# Altium PCB PCB1.PcbDoc (part 1 of 2)
Units mil, origin at the board's own origin, x right, y up, seen from the top; angles counter-clockwise.
Board outline 6000 x 4000 mil, 2 copper layers (Top Layer, Bottom Layer); 224 components, 172 nets, 745 pads, 57 vias.
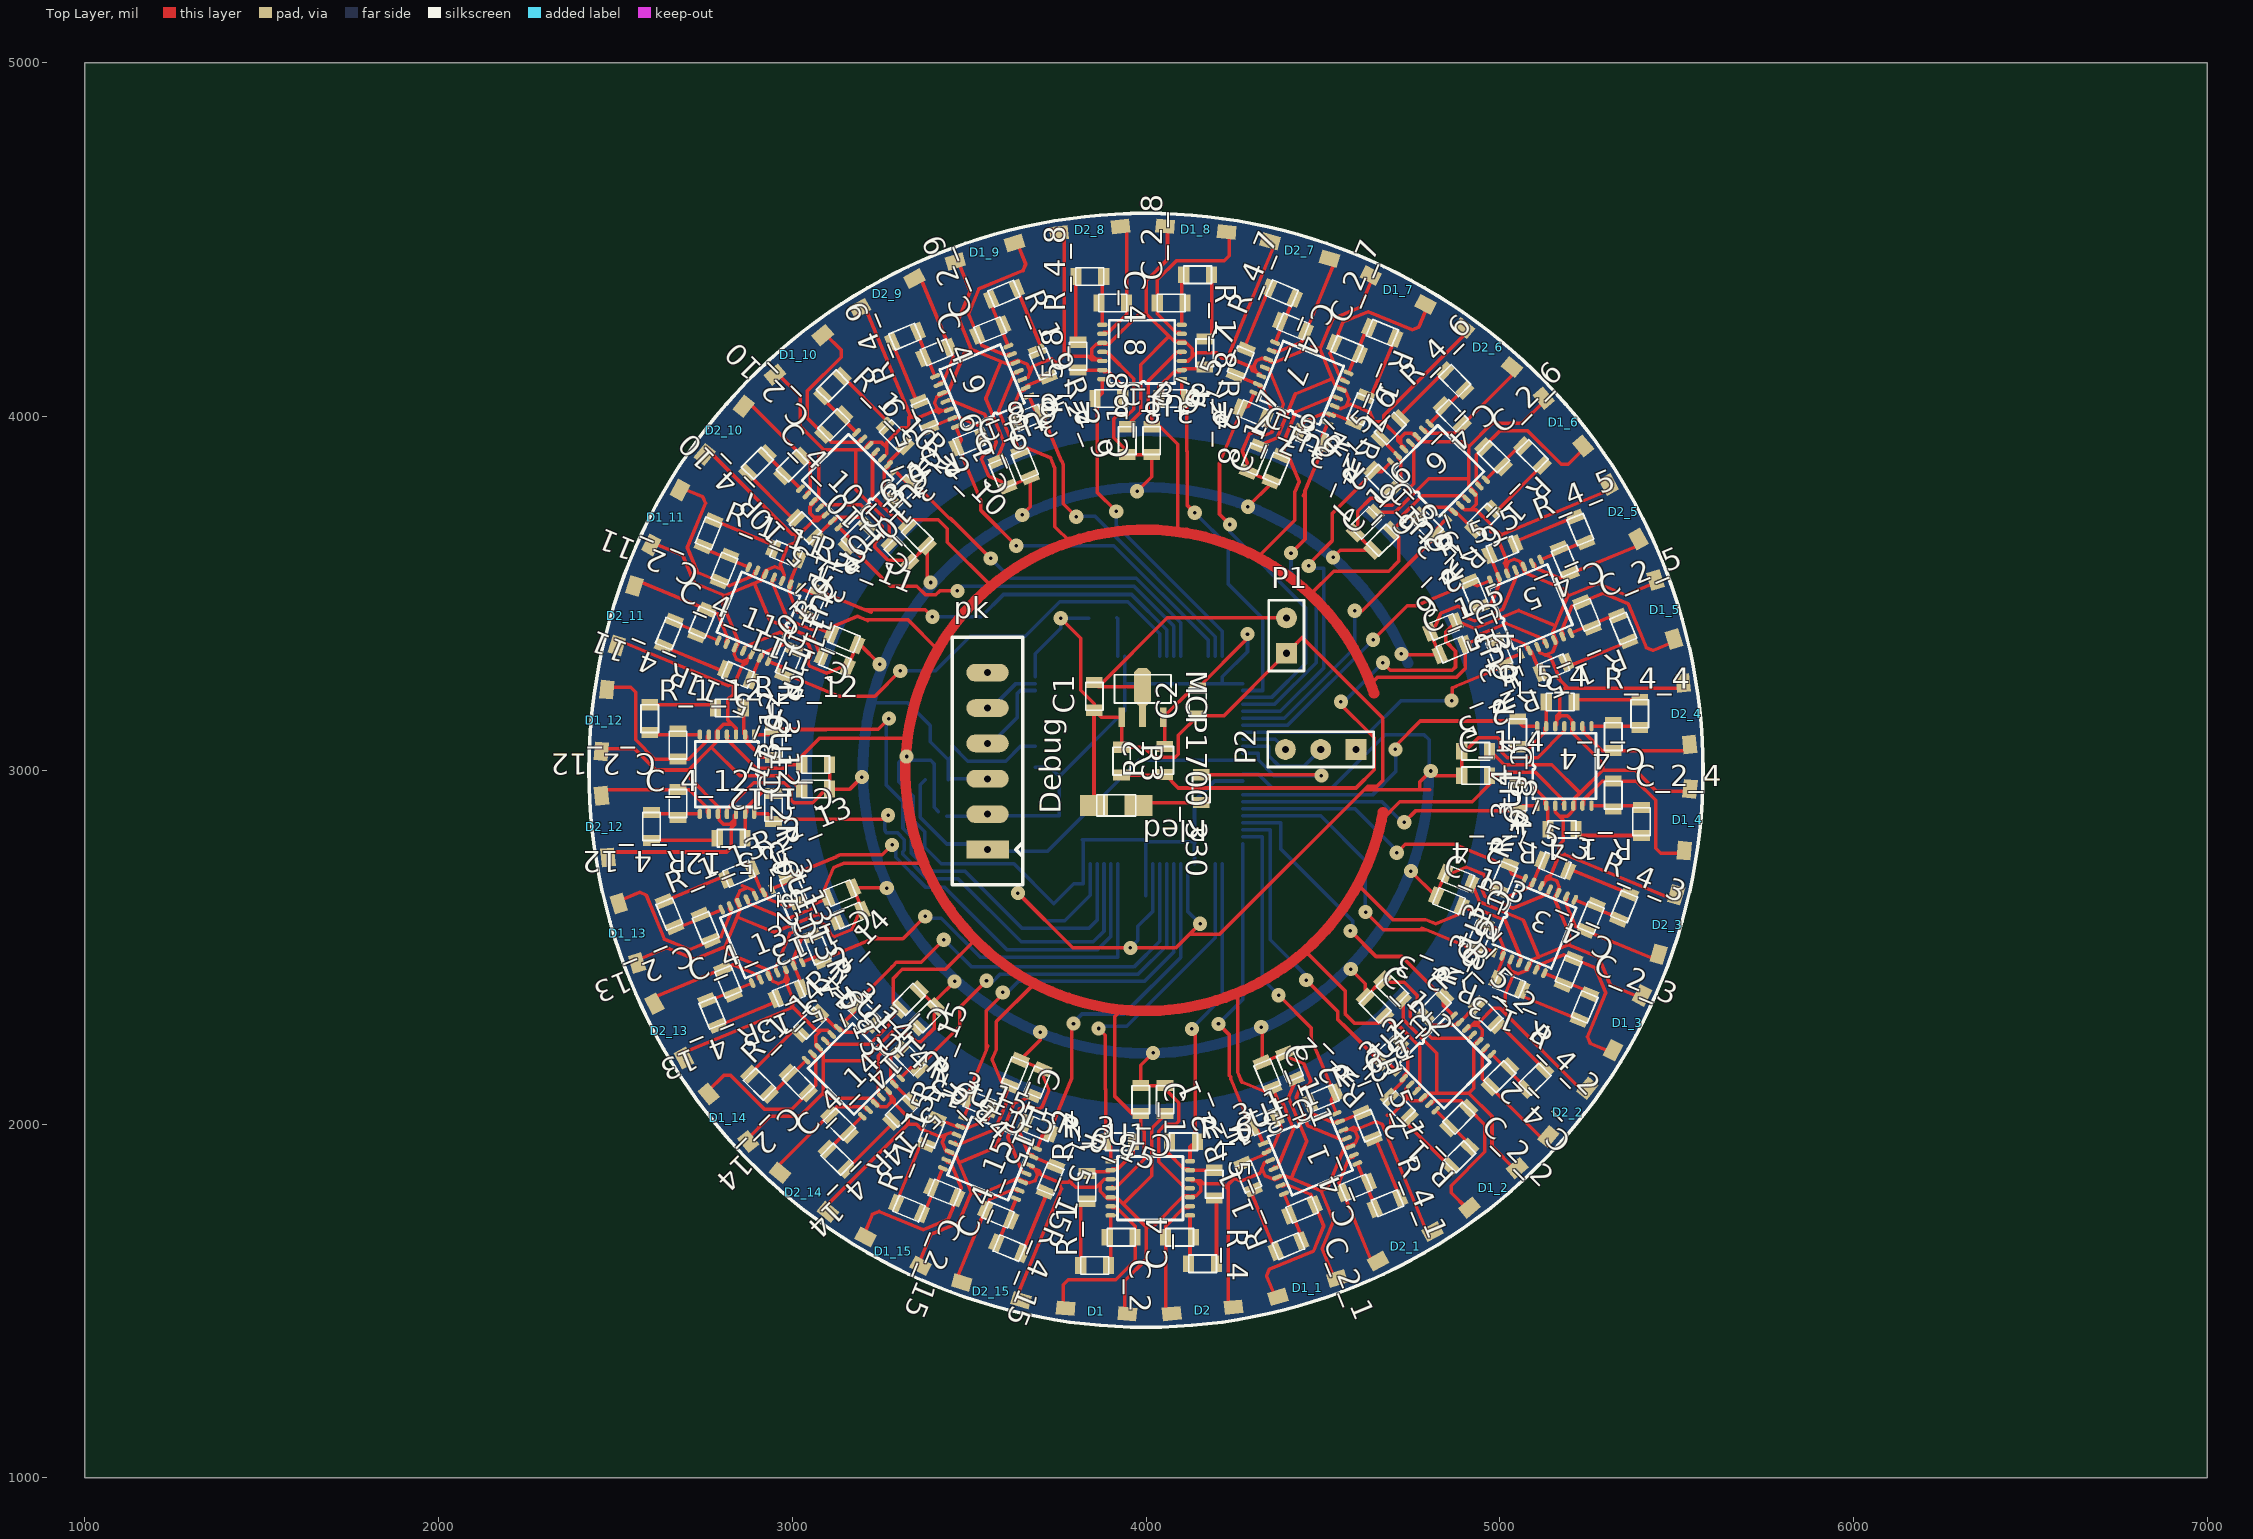
[diagram p0: Top Layer view]
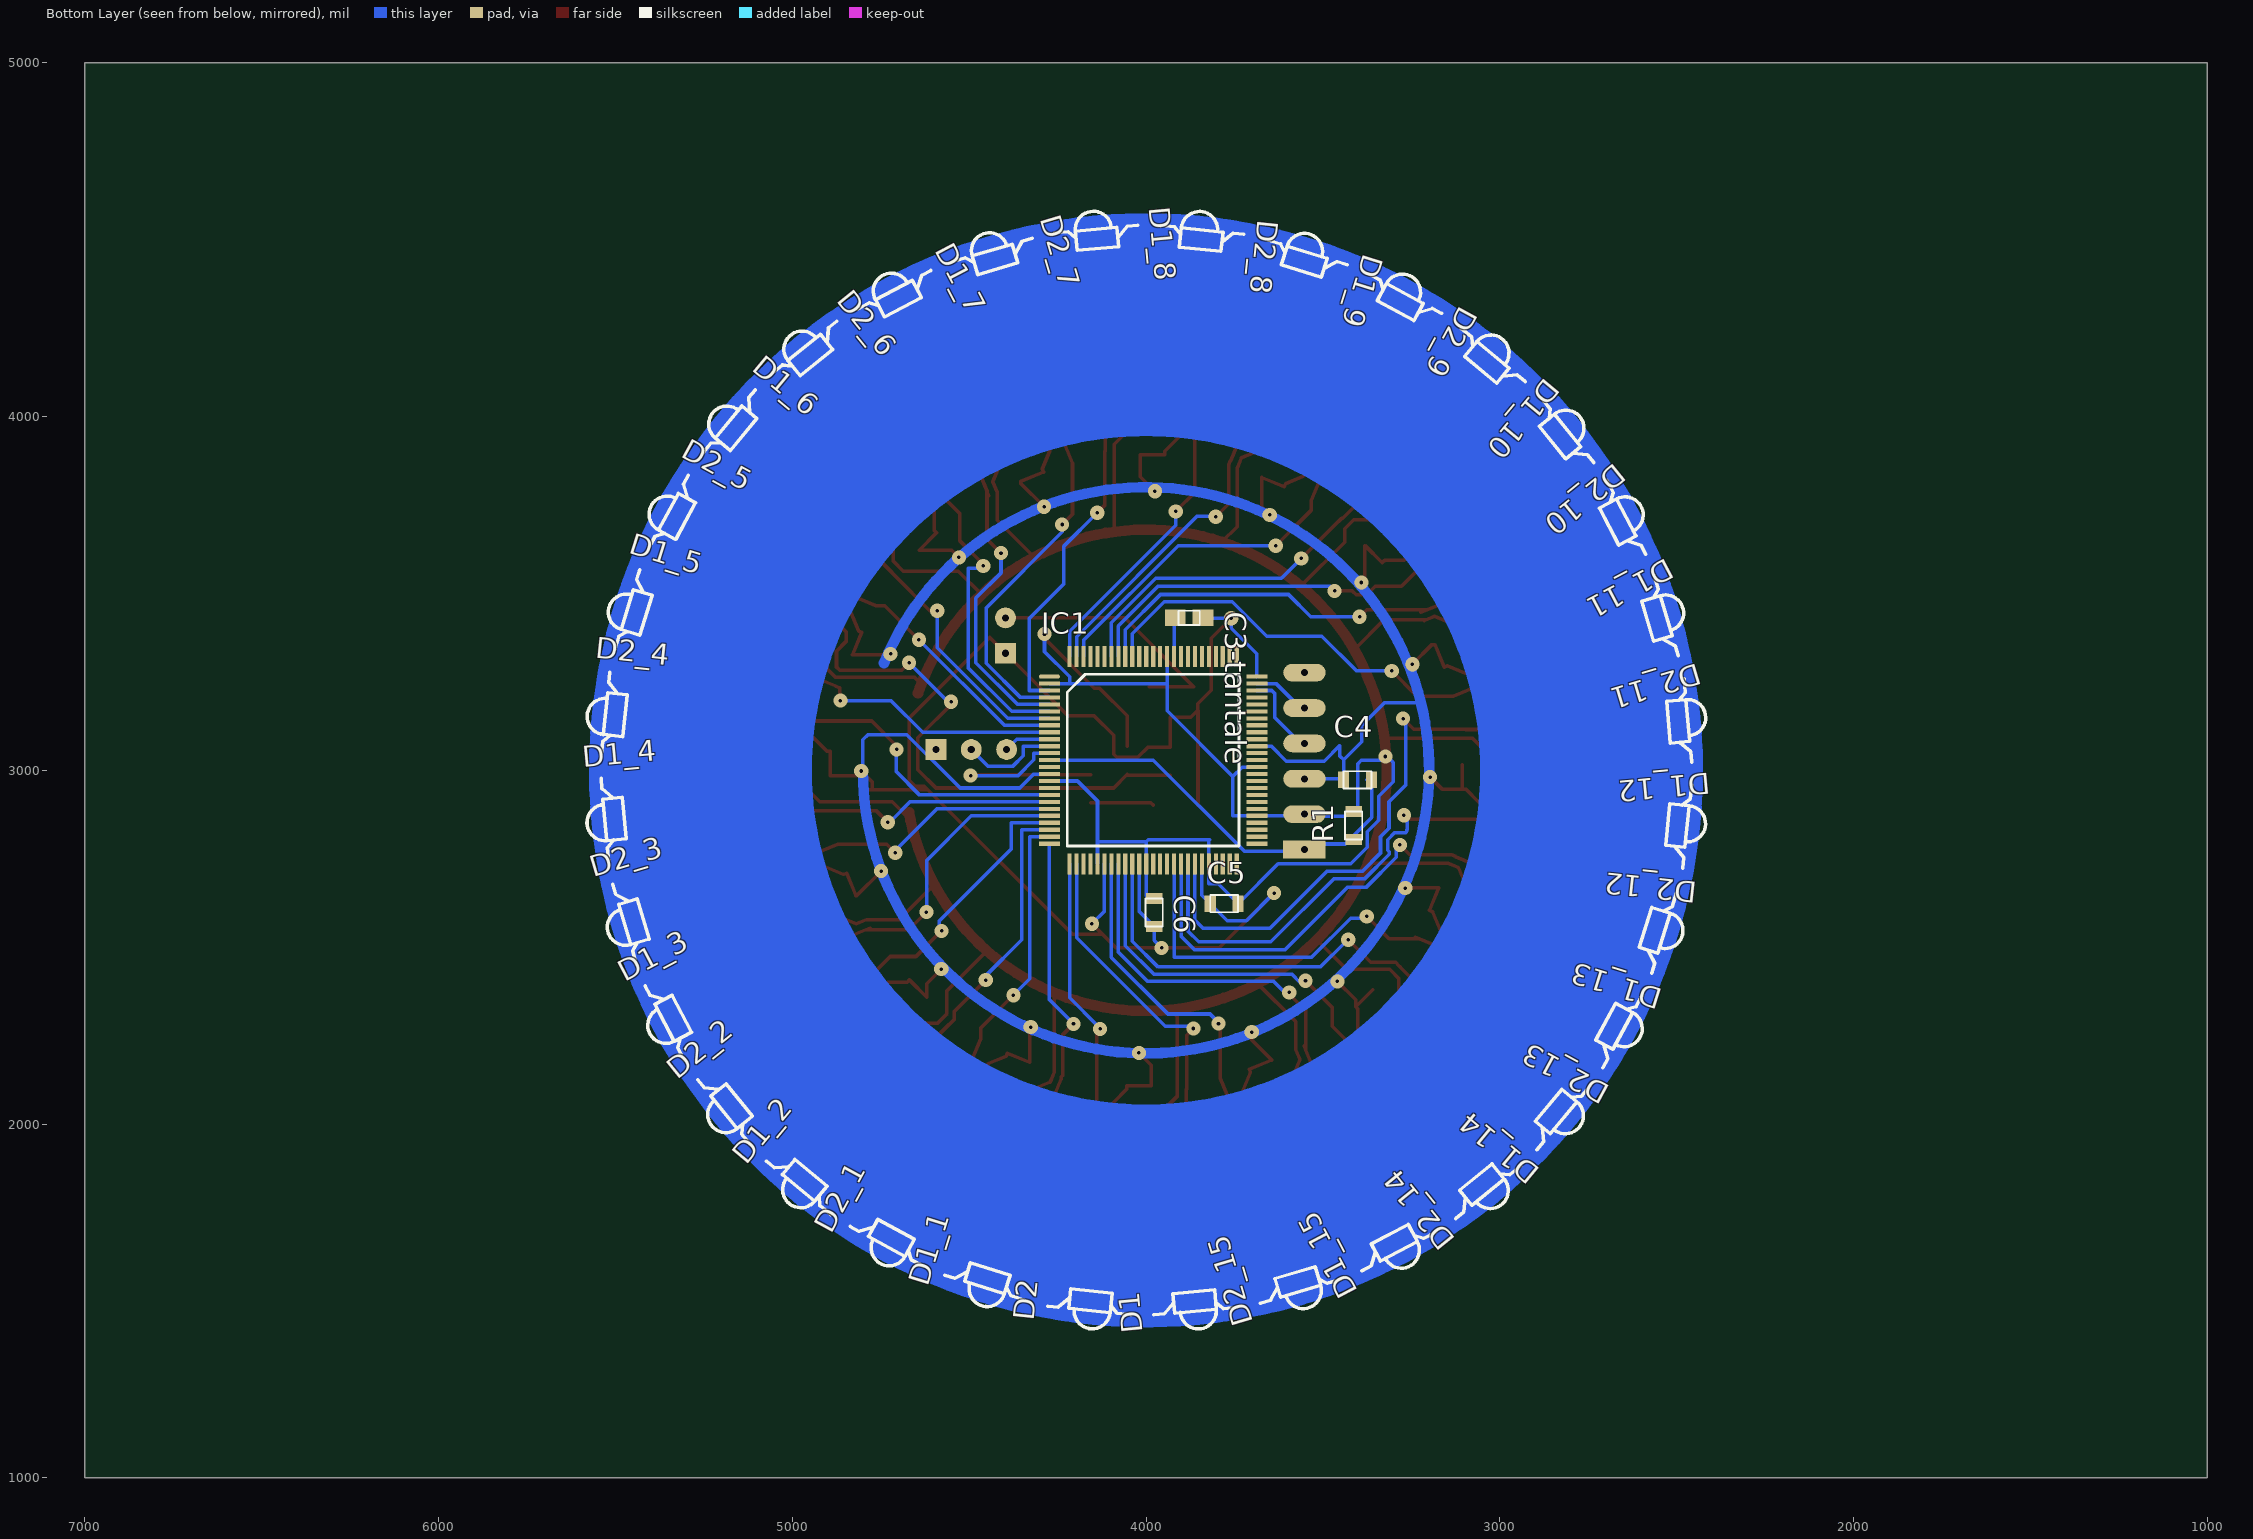
[diagram p1: Bottom Layer view, seen from below]

## Layer stack, top to bottom
Top Layer: signal copper 1.4
Dielectric: dielectric 12.6, FR-4, Dk 4.8
Bottom Layer: signal copper 1.4

## Board outline
1000,1000 7000,1000 7000,5000 1000,5000

## Design rules (kind name [scope] priority, off if disabled: settings)
Clearance [All] p1: gap=10
PolygonConnect [All] p1: connectstyle=Relief reliefconductorwidth=10 reliefentries=4 polygonreliefangle="90 Angle"
RoutingVias [All] p1: holewidth=28 width=50 viastyle="Through Hole" minholewidth=28 minwidth=50 maxholewidth=28 maxwidth=50
SilkscreenOverComponentPads [All] p1: minsilkscreentomaskgap=10
SolderMaskExpansion [All] p1: expansion=4
Width [All] p1: maxlimit=10 minlimit=10 preferedwidth=10
27 further rules are at their usual default settings.

## Classes and differential pairs
component class Sheet1: C1 C2 C3-tantale C4 C5 C6 Debug IC1 MCP1700_330 P1 P2 pk R1 R2 R3 Rled
component class Sheet2: C_1 C_1_1 C_1_2 C_2 C_2_1 C_2_2 C_3 C_3_1 C_3_2 C_4 C_4_1 C_4_2 D1 D1_1 D1_2 D2 D2_1 D2_2 R_1 R_1_1 R_1_2 R_2 R_2_1 R_2_2 R_3 R_3_1 R_3_2 R_4 R_4_1 R_4_2 R_5 R_5_1 R_5_2 R_6 R_6_1 R_6_2 U1 U1_1 U1_2
component class Sheet3: C_1_3 C_1_4 C_1_5 C_2_3 C_2_4 C_2_5 C_3_3 C_3_4 C_3_5 C_4_3 C_4_4 C_4_5 D1_3 D1_4 D1_5 D2_3 D2_4 D2_5 R_1_3 R_1_4 R_1_5 R_2_3 R_2_4 R_2_5 R_3_3 R_3_4 R_3_5 R_4_3 R_4_4 R_4_5 R_5_3 R_5_4 R_5_5 R_6_3 R_6_4 R_6_5 U1_3 U1_4 U1_5
component class Sheet4: C_1_6 C_1_7 C_1_8 C_2_6 C_2_7 C_2_8 C_3_6 C_3_7 C_3_8 C_4_6 C_4_7 C_4_8 D1_6 D1_7 D1_8 D2_6 D2_7 D2_8 R_1_6 R_1_7 R_1_8 R_2_6 R_2_7 R_2_8 R_3_6 R_3_7 R_3_8 R_4_6 R_4_7 R_4_8 R_5_6 R_5_7 R_5_8 R_6_6 R_6_7 R_6_8 U1_6 U1_7 U1_8
component class Sheet5: C_1_9 C_1_10 C_1_11 C_2_9 C_2_10 C_2_11 C_3_9 C_3_10 C_3_11 C_4_9 C_4_10 C_4_11 D1_9 D1_10 D1_11 D2_9 D2_10 D2_11 R_1_9 R_1_10 R_1_11 R_2_9 R_2_10 R_2_11 R_3_9 R_3_10 R_3_11 R_4_9 R_4_10 R_4_11 R_5_9 R_5_10 R_5_11 R_6_9 R_6_10 R_6_11 U1_9 U1_10 U1_11
component class Sheet6: C_1_12 C_1_13 C_1_14 C_2_12 C_2_13 C_2_14 C_3_12 C_3_13 C_3_14 C_4_12 C_4_13 C_4_14 D1_12 D1_13 D1_14 D2_12 D2_13 D2_14 R_1_12 R_1_13 R_1_14 R_2_12 R_2_13 R_2_14 R_3_12 R_3_13 R_3_14 R_4_12 R_4_13 R_4_14 R_5_12 R_5_13 R_5_14 R_6_12 R_6_13 R_6_14 U1_12 U1_13 U1_14
component class Sheet7: C_1_15 C_2_15 C_3_15 C_4_15 D1_15 D2_15 R_1_15 R_2_15 R_3_15 R_4_15 R_5_15 R_6_15 U1_15

## Components (designator, comment, footprint, x,y, rotation, side; value= is the part's Value field where it differs from the comment)
C1 "1uF" "cms805 - mini" 3854,3209 r90 top
C2 "1uF" "cms805 - mini" 4146,3193 r90 top
C3-tantale "10uF" cms805 3878,3431 r180 bottom
C4 "0.1uF" "cms805 - mini" 3402,2973 r180 bottom
C5 "0.1uF" "cms805 - mini" 3779,2623 r180 bottom
C6 "0.1uF" "cms805 - mini" 3977,2598 r270 bottom
C_1 "0.1uF" "cms805 - mini" 3985,2069 r270 top
C_1_1 "0.1uF" "cms805 - mini" 4343.24,2137.66 r292.5 top (schematic designator C_1)
C_1_2 "0.1uF" "cms805 - mini" 4647.82,2330.69 r315 top (schematic designator C_1)
C_1_3 "0.1uF" "cms805 - mini" 4856.4,2630.4 r337.5 top (schematic designator C_1)
C_1_4 "0.1uF" "cms805 - mini" 4932,2985 r0 top (schematic designator C_1)
C_1_5 "0.1uF" "cms805 - mini" 4866.34,3341.24 r22.5 top (schematic designator C_1)
C_1_6 "0.1uF" "cms805 - mini" 4668.8,3650.26 r45 top (schematic designator C_1)
C_1_7 "0.1uF" "cms805 - mini" 4368.6,3853.4 r67.5 top (schematic designator C_1)
C_1_8 "0.1uF" "cms805 - mini" 4016,3932 r90 top (schematic designator C_1)
C_1_9 "0.1uF" "cms805 - mini" 3657.76,3864.34 r112.5 top (schematic designator C_1)
C_1_10 "0.1uF" "cms805 - mini" 3353.18,3663.31 r135 top (schematic designator C_1)
C_1_11 "0.1uF" "cms805 - mini" 3146.6,3370.6 r157.5 top (schematic designator C_1)
C_1_12 "0.1uF" "cms805 - mini" 3066,3016 r180 top (schematic designator C_1)
C_1_13 "0.1uF" "cms805 - mini" 3135.66,2652.76 r202.5 top (schematic designator C_1)
C_1_14 "0.1uF" "cms805 - mini" 3330.69,2352.18 r225 top (schematic designator C_1)
C_1_15 "0.1uF" "cms805 - mini" 3629.4,2144.6 r247.5 top (schematic designator C_1)
C_2 "0.1uF" "cms805 - mini" 3855,1600 r0 top
C_2_1 "0.1uF" "cms805 - mini" 4402.62,1654.61 r22.5 top (schematic designator C_2)
C_2_2 "0.1uF" "cms805 - mini" 4887.53,1907.13 r45 top (schematic designator C_2)
C_2_3 "0.1uF" "cms805 - mini" 5239.95,2330.82 r67.5 top (schematic designator C_2)
C_2_4 "0.1uF" "cms805 - mini" 5401,2855 r90 top (schematic designator C_2)
C_2_5 "0.1uF" "cms805 - mini" 5349.39,3400.62 r112.5 top (schematic designator C_2)
C_2_6 "0.1uF" "cms805 - mini" 5092.36,3889.97 r135 top (schematic designator C_2)
C_2_7 "0.1uF" "cms805 - mini" 4668.18,4236.95 r157.5 top (schematic designator C_2)
C_2_8 "0.1uF" "cms805 - mini" 4146,4401 r180 top (schematic designator C_2)
C_2_9 "0.1uF" "cms805 - mini" 3598.38,4347.39 r202.5 top (schematic designator C_2)
C_2_10 "0.1uF" "cms805 - mini" 3113.47,4086.87 r225 top (schematic designator C_2)
C_2_11 "0.1uF" "cms805 - mini" 2763.05,3670.18 r247.5 top (schematic designator C_2)
C_2_12 "0.1uF" "cms805 - mini" 2597,3146 r270 top (schematic designator C_2)
C_2_13 "0.1uF" "cms805 - mini" 2652.61,2593.38 r292.5 top (schematic designator C_2)
C_2_14 "0.1uF" "cms805 - mini" 2907.13,2112.47 r315 top (schematic designator C_2)
C_2_15 "0.1uF" "cms805 - mini" 3329.82,1761.05 r337.5 top (schematic designator C_2)
C_3 "0.1uF" "cms805 - mini" 4054,2069 r270 top
C_3_1 "0.1uF" "cms805 - mini" 4406.99,2164.07 r292.5 top (schematic designator C_3)
C_3_2 "0.1uF" "cms805 - mini" 4696.61,2379.48 r315 top (schematic designator C_3)
C_3_3 "0.1uF" "cms805 - mini" 4882.8,2694.15 r337.5 top (schematic designator C_3)
C_3_4 "0.1uF" "cms805 - mini" 4932,3054 r0 top (schematic designator C_3)
C_3_5 "0.1uF" "cms805 - mini" 4839.93,3404.99 r22.5 top (schematic designator C_3)
C_3_6 "0.1uF" "cms805 - mini" 4620.01,3699.05 r45 top (schematic designator C_3)
C_3_7 "0.1uF" "cms805 - mini" 4304.85,3879.8 r67.5 top (schematic designator C_3)
C_3_8 "0.1uF" "cms805 - mini" 3947,3932 r90 top (schematic designator C_3)
C_3_9 "0.1uF" "cms805 - mini" 3594.01,3837.93 r112.5 top (schematic designator C_3)
C_3_10 "0.1uF" "cms805 - mini" 3304.39,3614.52 r135 top (schematic designator C_3)
C_3_11 "0.1uF" "cms805 - mini" 3120.2,3306.85 r157.5 top (schematic designator C_3)
C_3_12 "0.1uF" "cms805 - mini" 3066,2947 r180 top (schematic designator C_3)
C_3_13 "0.1uF" "cms805 - mini" 3162.07,2589.01 r202.5 top (schematic designator C_3)
C_3_14 "0.1uF" "cms805 - mini" 3379.48,2303.39 r225 top (schematic designator C_3)
C_3_15 "0.1uF" "cms805 - mini" 3693.15,2118.2 r247.5 top (schematic designator C_3)
C_4 "0.1uF" "cms805 - mini" 4160,1605 r180 top
C_4_1 "0.1uF" "cms805 - mini" 4682.49,1775.95 r202.5 top (schematic designator C_4)
C_4_2 "0.1uF" "cms805 - mini" 5099.66,2126.34 r225 top (schematic designator C_4)
C_4_3 "0.1uF" "cms805 - mini" 5352.05,2614.51 r247.5 top (schematic designator C_4)
C_4_4 "0.1uF" "cms805 - mini" 5396,3160 r270 top (schematic designator C_4)
C_4_5 "0.1uF" "cms805 - mini" 5228.05,3680.49 r292.5 top (schematic designator C_4)
C_4_6 "0.1uF" "cms805 - mini" 4873.15,4102.1 r315 top (schematic designator C_4)
C_4_7 "0.1uF" "cms805 - mini" 4384.49,4349.05 r337.5 top (schematic designator C_4)
C_4_8 "0.1uF" "cms805 - mini" 3841,4396 r0 top (schematic designator C_4)
C_4_9 "0.1uF" "cms805 - mini" 3318.51,4226.05 r22.5 top (schematic designator C_4)
C_4_10 "0.1uF" "cms805 - mini" 2901.34,3867.66 r45 top (schematic designator C_4)
C_4_11 "0.1uF" "cms805 - mini" 2650.95,3386.49 r67.5 top (schematic designator C_4)
C_4_12 "0.1uF" "cms805 - mini" 2602,2841 r90 top (schematic designator C_4)
C_4_13 "0.1uF" "cms805 - mini" 2773.95,2313.51 r112.5 top (schematic designator C_4)
C_4_14 "0.1uF" "cms805 - mini" 3126.34,1900.34 r135 top (schematic designator C_4)
C_4_15 "0.1uF" "cms805 - mini" 3613.51,1648.95 r157.5 top (schematic designator C_4)
D1 "Photodiode" TEMD1000 3860,1471 r354.75 bottom
D1_1 "Photodiode" TEMD1000 4456.6,1537.35 r17.25 bottom (schematic designator D1)
D1_2 "Photodiode" TEMD1000 4982.28,1819.45 r39.75 bottom (schematic designator D1)
D1_3 "Photodiode" TEMD1000 5361.04,2286.07 r62.25 bottom (schematic designator D1)
D1_4 "Photodiode" TEMD1000 5530,2860 r84.75 bottom (schematic designator D1)
D1_5 "Photodiode" TEMD1000 5466.65,3454.6 r107.25 bottom (schematic designator D1)
D1_6 "Photodiode" TEMD1000 5180.04,3984.72 r129.75 bottom (schematic designator D1)
D1_7 "Photodiode" TEMD1000 4712.93,4358.04 r152.25 bottom (schematic designator D1)
D1_8 "Photodiode" TEMD1000 4141,4530 r174.75 bottom (schematic designator D1)
D1_9 "Photodiode" TEMD1000 3544.4,4464.65 r197.25 bottom (schematic designator D1)
D1_10 "Photodiode" TEMD1000 3018.72,4174.55 r219.75 bottom (schematic designator D1)
D1_11 "Photodiode" TEMD1000 2641.96,3714.93 r242.25 bottom (schematic designator D1)
D1_12 "Photodiode" TEMD1000 2468,3141 r264.75 bottom (schematic designator D1)
D1_13 "Photodiode" TEMD1000 2535.35,2539.4 r287.25 bottom (schematic designator D1)
D1_14 "Photodiode" TEMD1000 2819.45,2017.72 r309.75 bottom (schematic designator D1)
D1_15 "Photodiode" TEMD1000 3285.07,1639.96 r332.25 bottom (schematic designator D1)
D2 "Photodiode" TEMD1000 4160,1473 r6 bottom
D2_1 "Photodiode" TEMD1000 4733,1654 r28.5 bottom (schematic designator D2)
D2_2 "Photodiode" TEMD1000 5193,2033 r51 bottom (schematic designator D2)
D2_3 "Photodiode" TEMD1000 5474,2564 r73.5 bottom (schematic designator D2)
D2_4 "Photodiode" TEMD1000 5528,3160 r96 bottom (schematic designator D2)
D2_5 "Photodiode" TEMD1000 5350,3731 r118.5 bottom (schematic designator D2)
D2_6 "Photodiode" TEMD1000 4966.49,4195.44 r141 bottom (schematic designator D2)
D2_7 "Photodiode" TEMD1000 4435,4471 r163.5 bottom (schematic designator D2)
D2_8 "Photodiode" TEMD1000 3841,4528 r186 bottom (schematic designator D2)
D2_9 "Photodiode" TEMD1000 3268,4348 r208.5 bottom (schematic designator D2)
D2_10 "Photodiode" TEMD1000 2808,3961 r231 bottom (schematic designator D2)
D2_11 "Photodiode" TEMD1000 2529,3437 r253.5 bottom (schematic designator D2)
D2_12 "Photodiode" TEMD1000 2470,2841 r276 bottom (schematic designator D2)
D2_13 "Photodiode" TEMD1000 2652,2263 r298.5 bottom (schematic designator D2)
D2_14 "Photodiode" TEMD1000 3033,1807 r321 bottom (schematic designator D2)
D2_15 "Photodiode" TEMD1000 3563,1527 r343.5 bottom (schematic designator D2)
Debug "LED" cms1206 3916,2901 r180 top
IC1 "DSPIC33EP512MU810" TQFP100PF 4273,3265 r180 bottom
MCP1700_330 "MCP1700" SOT89 3931,3150 r0 top
P1 "Header 2" HDR1X2 4397,3331 r90 top
P2 "Header 3" HDR1X3 4594,3059 r180 top
pk "pickit3" pickit3 3552,2776 r90 top
R1 "10kohm" "cms805 - mini" 3413,2844 r90 bottom
R2 "1kohm" "cms805 - mini" 4053,3028 r90 top
R3 "1kohm" "cms805 - mini" 3931,3026 r270 top
R_1 "10kohm" "cms805 - mini" 3930,1680 r180 top
R_1_1 "10kohm" "cms805 - mini" 4441.29,1757.23 r202.5 top (schematic designator R_1)
R_1_2 "10kohm" "cms805 - mini" 4883.99,2016.74 r225 top (schematic designator R_1)
R_1_3 "10kohm" "cms805 - mini" 5194.74,2430.72 r247.5 top (schematic designator R_1)
R_1_4 "10kohm" "cms805 - mini" 5321,2930 r270 top (schematic designator R_1)
R_1_5 "10kohm" "cms805 - mini" 5246.77,3439.29 r292.5 top (schematic designator R_1)
R_1_6 "10kohm" "cms805 - mini" 4982.76,3886.44 r315 top (schematic designator R_1)
R_1_7 "10kohm" "cms805 - mini" 4568.28,4191.74 r337.5 top (schematic designator R_1)
R_1_8 "10kohm" "cms805 - mini" 4071,4321 r0 top (schematic designator R_1)
R_1_9 "10kohm" "cms805 - mini" 3559.71,4244.77 r22.5 top (schematic designator R_1)
R_1_10 "10kohm" "cms805 - mini" 3117.01,3977.26 r45 top (schematic designator R_1)
R_1_11 "10kohm" "cms805 - mini" 2808.26,3570.28 r67.5 top (schematic designator R_1)
R_1_12 "10kohm" "cms805 - mini" 2677,3071 r90 top (schematic designator R_1)
R_1_13 "10kohm" "cms805 - mini" 2755.23,2554.71 r112.5 top (schematic designator R_1)
R_1_14 "10kohm" "cms805 - mini" 3016.74,2116.01 r135 top (schematic designator R_1)
R_1_15 "10kohm" "cms805 - mini" 3429.72,1806.26 r157.5 top (schematic designator R_1)
R_2 "10M" "cms805 - mini" 3925,1950 r180 top
R_2_1 "10M" "cms805 - mini" 4333.35,2004.76 r202.5 top (schematic designator R_2)
R_2_2 "10M" "cms805 - mini" 4689.54,2204.12 r225 top (schematic designator R_2)
R_2_3 "10M" "cms805 - mini" 4943.38,2529.43 r247.5 top (schematic designator R_2)
R_2_4 "10M" "cms805 - mini" 5051,2925 r270 top (schematic designator R_2)
R_2_5 "10M" "cms805 - mini" 4999.24,3331.35 r292.5 top (schematic designator R_2)
R_2_6 "10M" "cms805 - mini" 4795.37,3691.98 r315 top (schematic designator R_2)
R_2_7 "10M" "cms805 - mini" 4469.57,3940.38 r337.5 top (schematic designator R_2)
R_2_8 "10M" "cms805 - mini" 4076,4051 r0 top (schematic designator R_2)
R_2_9 "10M" "cms805 - mini" 3667.65,3997.24 r22.5 top (schematic designator R_2)
R_2_10 "10M" "cms805 - mini" 3311.46,3789.88 r45 top (schematic designator R_2)
R_2_11 "10M" "cms805 - mini" 3059.62,3471.57 r67.5 top (schematic designator R_2)
R_2_12 "10M" "cms805 - mini" 2947,3076 r90 top (schematic designator R_2)
R_2_13 "10M" "cms805 - mini" 3002.76,2662.65 r112.5 top (schematic designator R_2)
R_2_14 "10M" "cms805 - mini" 3204.12,2310.46 r135 top (schematic designator R_2)
R_2_15 "10M" "cms805 - mini" 3528.43,2057.62 r157.5 top (schematic designator R_2)
R_3 "1kohm" "cms805 - mini" 3833,1821 r90 top
R_3_1 "1kohm" "cms805 - mini" 4288.8,1851.01 r112.5 top (schematic designator R_3)
R_3_2 "1kohm" "cms805 - mini" 4715.85,2048 r135 top (schematic designator R_3)
R_3_3 "1kohm" "cms805 - mini" 5027,2394.22 r157.5 top (schematic designator R_3)
R_3_4 "1kohm" "cms805 - mini" 5176,2833 r180 top (schematic designator R_3)
R_3_5 "1kohm" "cms805 - mini" 5152,3291 r202.5 top (schematic designator R_3)
R_3_6 "1kohm" "cms805 - mini" 4954.47,3709.66 r225 top (schematic designator R_3)
R_3_7 "1kohm" "cms805 - mini" 4606,4021 r247.5 top (schematic designator R_3)
R_3_8 "1kohm" "cms805 - mini" 4166,4180 r270 top (schematic designator R_3)
R_3_9 "1kohm" "cms805 - mini" 3708,4149 r292.5 top (schematic designator R_3)
R_3_10 "1kohm" "cms805 - mini" 3291,3946 r315 top (schematic designator R_3)
R_3_11 "1kohm" "cms805 - mini" 2982.4,3611.8 r337.5 top (schematic designator R_3)
R_3_12 "1kohm" "cms805 - mini" 2822,3176 r0 top (schematic designator R_3)
R_3_13 "1kohm" "cms805 - mini" 2849.01,2707.2 r22.5 top (schematic designator R_3)
R_3_14 "1kohm" "cms805 - mini" 3050,2285 r45 top (schematic designator R_3)
R_3_15 "1kohm" "cms805 - mini" 3394,1978 r67.5 top (schematic designator R_3)
R_4 "10kohm" "cms805 - mini" 4095,1680 r0 top
R_4_1 "10kohm" "cms805 - mini" 4593.73,1820.37 r22.5 top (schematic designator R_4)
R_4_2 "10kohm" "cms805 - mini" 5000.67,2133.41 r45 top (schematic designator R_4)
R_4_3 "10kohm" "cms805 - mini" 5257.88,2583.16 r67.5 top (schematic designator R_4)
R_4_4 "10kohm" "cms805 - mini" 5321,3095 r90 top (schematic designator R_4)
R_4_5 "10kohm" "cms805 - mini" 5183.63,3591.73 r112.5 top (schematic designator R_4)
R_4_6 "10kohm" "cms805 - mini" 4866.08,4003.11 r135 top (schematic designator R_4)
R_4_7 "10kohm" "cms805 - mini" 4415.84,4254.88 r157.5 top (schematic designator R_4)
R_4_8 "10kohm" "cms805 - mini" 3906,4321 r180 top (schematic designator R_4)
R_4_9 "10kohm" "cms805 - mini" 3407.27,4181.63 r202.5 top (schematic designator R_4)
R_4_10 "10kohm" "cms805 - mini" 3000.33,3860.59 r225 top (schematic designator R_4)
R_4_11 "10kohm" "cms805 - mini" 2745.12,3417.84 r247.5 top (schematic designator R_4)
R_4_12 "10kohm" "cms805 - mini" 2677,2906 r270 top (schematic designator R_4)
R_4_13 "10kohm" "cms805 - mini" 2818.37,2402.27 r292.5 top (schematic designator R_4)
R_4_14 "10kohm" "cms805 - mini" 3133.41,1999.33 r315 top (schematic designator R_4)
R_4_15 "10kohm" "cms805 - mini" 3582.16,1743.12 r337.5 top (schematic designator R_4)
R_5 "10M" "cms805 - mini" 4106,1950 r0 top
R_5_1 "10M" "cms805 - mini" 4500.57,2074.03 r22.5 top (schematic designator R_5)
R_5_2 "10M" "cms805 - mini" 4817.53,2332.11 r45 top (schematic designator R_5)
R_5_3 "10M" "cms805 - mini" 5012.64,2696.65 r67.5 top (schematic designator R_5)
R_5_4 "10M" "cms805 - mini" 5051,3106 r90 top (schematic designator R_5)
R_5_5 "10M" "cms805 - mini" 4929.97,3498.57 r112.5 top (schematic designator R_5)
R_5_6 "10M" "cms805 - mini" 4667.39,3819.97 r135 top (schematic designator R_5)
R_5_7 "10M" "cms805 - mini" 4302.35,4009.64 r157.5 top (schematic designator R_5)
R_5_8 "10M" "cms805 - mini" 3895,4051 r180 top (schematic designator R_5)
R_5_9 "10M" "cms805 - mini" 3500.43,3927.97 r202.5 top (schematic designator R_5)
R_5_10 "10M" "cms805 - mini" 3183.47,3661.89 r225 top (schematic designator R_5)
R_5_11 "10M" "cms805 - mini" 2990.36,3304.35 r247.5 top (schematic designator R_5)
R_5_12 "10M" "cms805 - mini" 2947,2895 r270 top (schematic designator R_5)
R_5_13 "10M" "cms805 - mini" 3072.03,2495.43 r292.5 top (schematic designator R_5)
R_5_14 "10M" "cms805 - mini" 3332.11,2182.47 r315 top (schematic designator R_5)
R_5_15 "10M" "cms805 - mini" 3695.65,1988.36 r337.5 top (schematic designator R_5)
R_6 "1kohm" "cms805 - mini" 4193,1830 r90 top
R_6_1 "1kohm" "cms805 - mini" 4627,1995 r112.5 top (schematic designator R_6)
R_6_2 "1kohm" "cms805 - mini" 4963.9,2308.77 r135 top (schematic designator R_6)
R_6_3 "1kohm" "cms805 - mini" 5156.8,2731.11 r157.5 top (schematic designator R_6)
R_6_4 "1kohm" "cms805 - mini" 5171,3193 r180 top (schematic designator R_6)
R_6_5 "1kohm" "cms805 - mini" 5007.55,3624.87 r202.5 top (schematic designator R_6)
R_6_6 "1kohm" "cms805 - mini" 4690.72,3966.34 r225 top (schematic designator R_6)
R_6_7 "1kohm" "cms805 - mini" 4267.89,4153.8 r247.5 top (schematic designator R_6)
R_6_8 "1kohm" "cms805 - mini" 3808,4171 r270 top (schematic designator R_6)
R_6_9 "1kohm" "cms805 - mini" 3374.13,4005.55 r292.5 top (schematic designator R_6)
R_6_10 "1kohm" "cms805 - mini" 3037.1,3685.23 r315 top (schematic designator R_6)
R_6_11 "1kohm" "cms805 - mini" 2846.2,3269.89 r337.5 top (schematic designator R_6)
R_6_12 "1kohm" "cms805 - mini" 2827,2808 r0 top (schematic designator R_6)
R_6_13 "1kohm" "cms805 - mini" 2990,2369 r22.5 top (schematic designator R_6)
R_6_14 "1kohm" "cms805 - mini" 3308.77,2036.1 r45 top (schematic designator R_6)
R_6_15 "1kohm" "cms805 - mini" 3730.11,1844.2 r67.5 top (schematic designator R_6)
Rled "1kohm" "cms805 - mini" 4156,2948 r270 top
U1 "TL084CN" TSSOP14 3900,1895 r0 top
U1_1 "TL084CN" TSSOP14 4331.3,1944.38 r22.5 top (schematic designator U1)
U1_2 "TL084CN" TSSOP14 4710.75,2147.55 r45 top (schematic designator U1)
U1_3 "TL084CN" TSSOP14 4984.63,2485.28 r67.5 top (schematic designator U1)
U1_4 "TL084CN" TSSOP14 5106,2900 r90 top (schematic designator U1)
U1_5 "TL084CN" TSSOP14 5059.62,3329.3 r112.5 top (schematic designator U1)
U1_6 "TL084CN" TSSOP14 4851.94,3713.2 r135 top (schematic designator U1)
U1_7 "TL084CN" TSSOP14 4513.72,3981.63 r157.5 top (schematic designator U1)
U1_8 "TL084CN" TSSOP14 4101,4106 r180 top (schematic designator U1)
U1_9 "TL084CN" TSSOP14 3669.7,4057.62 r202.5 top (schematic designator U1)
U1_10 "TL084CN" TSSOP14 3290.25,3846.45 r225 top (schematic designator U1)
U1_11 "TL084CN" TSSOP14 3018.37,3515.72 r247.5 top (schematic designator U1)
U1_12 "TL084CN" TSSOP14 2892,3101 r270 top (schematic designator U1)
U1_13 "TL084CN" TSSOP14 2942.38,2664.7 r292.5 top (schematic designator U1)
U1_14 "TL084CN" TSSOP14 3147.55,2289.25 r315 top (schematic designator U1)
U1_15 "TL084CN" TSSOP14 3484.28,2016.37 r337.5 top (schematic designator U1)

## Footprints (in the part's own frame and the unit in brackets; to place one, negate y for a bottom-side part, rotate by r counter-clockwise, add the part's x,y. Pads: shape width x height; smd on the part's side, far side on the other; paste and mask are expansions set on the pad)
cms805 [mm]
  rect 1.5x1.2 smd: 1(-1,0) 2(1,0)
  silkscreen extent -0.76,-0.51 0.76,0.51
"cms805 - mini" [mm]
  rect 0.8x1.2 smd: 1(-1,0) 2(1,0)
  silkscreen extent -1,-0.62 1,0.62
cms1206 [mm]
  rect 2x1.5 smd: 1(-1.6,0) 2(1.6,0)
  silkscreen extent -1.4,-0.76 1.4,0.76
HDR1X2 [mm] "Connector; Header; 2 Position"
  rect 1.5x1.5 hole 0.508: 1(0,0)
  round 1.5 hole 0.508: 2(2.54,0)
  silkscreen extent -1.27,-1.27 3.81,1.27
HDR1X3 [mm] "Connector; Header; 3 Position"
  rect 1.5x1.5 hole 0.508: 1(0,0)
  round 1.5 hole 0.508: 2(2.54,0) 3(5.08,0)
  silkscreen extent -1.27,-1.27 6.35,1.27
pickit3 [mil]
  rect 50x120 hole 20: 1(0,0)
  oval 50x120 hole 20: 2(100,0) 3(200,0) 4(300,0) 5(400,0) 6(500,0)
  silkscreen extent -100,-100 600,100
SOT89 [mm]
  rect 0.48x1.4 smd: 1(0,0) 3(3,0)
  rect 0.48x2 smd: 2(1.5,0.3)
  oct 1.2x2.7 smd: 2(1.5,2.2)
  silkscreen extent -0.51,1.02 3.56,3.05
TEMD1000 [mm]
  rect 1.35x1 smd far side: 1(2.225,0) 2(-2.225,0)
  silkscreen extent -3,-1.4 3,1.3
TQFP100PF [mm]
  oval 1.5x0.3 smd: 1(0,0)
  rect 1.5x0.3 smd: 2(0,-0.5) 3(0,-1) 4(0,-1.5) 5(0,-2) 6(0,-2.5) 7(0,-3) 8(0,-3.5) 9(0,-4) 10(0,-4.5) 11(0,-5) 12(0,-5.5) 13(0,-6) 14(0,-6.5) 15(0,-7) 16(0,-7.5) 17(0,-8) 18(0,-8.5) 19(0,-9) 20(0,-9.5) 21(0,-10) 22(0,-10.5) 23(0,-11) 24(0,-11.5) 25(0,-12) 51(14.9,-12) 52(14.9,-11.5) 53(14.9,-11) 54(14.9,-10.5) 55(14.9,-10) 56(14.9,-9.5) 57(14.9,-9) 58(14.9,-8.5) 59(14.9,-8) 60(14.9,-7.5) 61(14.9,-7) 62(14.9,-6.5) 63(14.9,-6) 64(14.9,-5.5) 65(14.9,-5) 66(14.9,-4.5) 67(14.9,-4) 68(14.9,-3.5) 69(14.9,-3) 70(14.9,-2.5) 71(14.9,-2) 72(14.9,-1.5) 73(14.9,-1) 74(14.9,-0.5) 75(14.9,0)
  rect 0.3x1.5 smd: 26(1.45,-13.45) 27(1.95,-13.45) 28(2.45,-13.45) 29(2.95,-13.45) 30(3.45,-13.45) 31(3.95,-13.45) 32(4.45,-13.45) 33(4.95,-13.45) 34(5.45,-13.45) 35(5.95,-13.45) 36(6.45,-13.45) 37(6.95,-13.45) 38(7.45,-13.45) 39(7.95,-13.45) 40(8.45,-13.45) 41(8.95,-13.45) 42(9.45,-13.45) 43(9.95,-13.45) 44(10.45,-13.45) 45(10.95,-13.45) 46(11.45,-13.45) 47(11.95,-13.45) 48(12.45,-13.45) 49(12.95,-13.45) 50(13.45,-13.45) 76(13.45,1.45) 77(12.95,1.45) 78(12.45,1.45) 79(11.95,1.45) 80(11.45,1.45) 81(10.95,1.45) 82(10.45,1.45) 83(9.95,1.45) 84(9.45,1.45) 85(8.95,1.45) 86(8.45,1.45) 87(7.95,1.45) 88(7.45,1.45) 89(6.95,1.45) 90(6.45,1.45) 91(5.95,1.45) 92(5.45,1.45) 93(4.95,1.45) 94(4.45,1.45) 95(3.95,1.45) 96(3.45,1.45) 97(2.95,1.45) 98(2.45,1.45) 99(1.95,1.45) 100(1.45,1.45)
  silkscreen extent 1.28,-12.16 13.61,0.16
TSSOP14 [mm]
  rect 0.75x0.32 smd: 1(0,0)
  oval 0.75x0.32 smd: 2(0,-0.65) 3(0,-1.3) 4(0,-1.95) 5(0,-2.6) 6(0,-3.25) 7(0,-3.9) 8(5.7,-3.9) 9(5.7,-3.25) 10(5.7,-2.6) 11(5.7,-1.95) 12(5.7,-1.3) 13(5.7,-0.65) 14(5.7,0)
  silkscreen extent 0.5,-4.22 5.2,0.33

## Part data
C1 C2 C3-tantale C4 C5 C6 C_1 C_1_1 C_1_2 C_1_3 C_1_4 C_1_5 C_1_6 C_1_7 C_1_8 C_1_9 C_1_10 C_1_11 C_1_12 C_1_13 C_1_14 C_1_15 C_2 C_2_1 C_2_2 C_2_3 C_2_4 C_2_5 C_2_6 C_2_7 C_2_8 C_2_9 C_2_10 C_2_11 C_2_12 C_2_13 C_2_14 C_2_15 C_3 C_3_1 C_3_2 C_3_3 C_3_4 C_3_5 C_3_6 C_3_7 C_3_8 C_3_9 C_3_10 C_3_11 C_3_12 C_3_13 C_3_14 C_3_15 C_4 C_4_1 C_4_2 C_4_3 C_4_4 C_4_5 C_4_6 C_4_7 C_4_8 C_4_9 C_4_10 C_4_11 C_4_12 C_4_13 C_4_14 C_4_15: library part Capa
P1: "Header, 2-Pin"
P2: "Header, 3-Pin"
R1 R2 R3 R_1 R_1_1 R_1_2 R_1_3 R_1_4 R_1_5 R_1_6 R_1_7 R_1_8 R_1_9 R_1_10 R_1_11 R_1_12 R_1_13 R_1_14 R_1_15 R_2 R_2_1 R_2_2 R_2_3 R_2_4 R_2_5 R_2_6 R_2_7 R_2_8 R_2_9 R_2_10 R_2_11 R_2_12 R_2_13 R_2_14 R_2_15 R_3 R_3_1 R_3_2 R_3_3 R_3_4 R_3_5 R_3_6 R_3_7 R_3_8 R_3_9 R_3_10 R_3_11 R_3_12 R_3_13 R_3_14 R_3_15 R_4 R_4_1 R_4_2 R_4_3 R_4_4 R_4_5 R_4_6 R_4_7 R_4_8 R_4_9 R_4_10 R_4_11 R_4_12 R_4_13 R_4_14 R_4_15 R_5 R_5_1 R_5_2 R_5_3 R_5_4 R_5_5 R_5_6 R_5_7 R_5_8 R_5_9 R_5_10 R_5_11 R_5_12 R_5_13 R_5_14 R_5_15 R_6 R_6_1 R_6_2 R_6_3 R_6_4 R_6_5 R_6_6 R_6_7 R_6_8 R_6_9 R_6_10 R_6_11 R_6_12 R_6_13 R_6_14 R_6_15 Rled: library part Resistance
U1 U1_1 U1_2 U1_3 U1_4 U1_5 U1_6 U1_7 U1_8 U1_9 U1_10 U1_11 U1_12 U1_13 U1_14 U1_15: "General-Purpose J-FET Quad Operational Amplifier"

## Via types
v1: diameter 40, hole 10, Top Layer to Bottom Layer, 57 vias

## Nets (pads, with @x,y where several pads share a name; then routed paths per layer and width w, separated by ;. In a path a pad name is that pad's centre, name@x,y a point inside that pad or via, vN(x,y) a via of type N, cw(c..) or ccw(c..) an arc to the next point about the centre after c; other vN are vias at no path point)
ADC1: IC1.27 R_2.2 U1.1 | length 1025.2
  Top Layer w10: v1(3866,2270) 3885,2251 3885,2099 3885.63,2098.37 R_2.2@3885.63,1950 3900,1935.63 U1.1@3900,1895
  Bottom Layer w10: v1@3873,2276 3946,2276 4196.23,2526.23 IC1.27@4196.23,2735.47
ADC2: IC1.26 R_5.2 U1.14 | length 874.2
  Top Layer w10: U1.14@4124.41,1895 4124.41,1935.04 4139.37,1950 4139.37,2259.63 v1(4130,2269)
  Bottom Layer w10: v1@4137,2278 4215.91,2356.91 IC1.26@4215.91,2735.47
ADC3: IC1.25 R_2_1.2 U1_1.1 | length 918.1
  Top Layer w10: v1(4205,2283) 4234.78,2253.22 4234.78,2138.2 4239.37,2133.61 4239.37,2127.11 4240.2,2126.77 R_2_1.2@4296.98,1989.69 4315.75,1981.92 U1_1.1@4331.3,1944.38
  Bottom Layer w10: v1(4205,2283) 4273,2351 IC1.25@4273,2792.56
ADC4: IC1.24 R_5_1.2 U1_1.14 | length 912.3
  Top Layer w10: v1(4375,2364) 4467.63,2271.37 4467.63,2240.74 4531.4,2086.8 4523.3,2067.25 U1_1.14@4538.63,2030.26
  Bottom Layer w10: IC1.24@4273,2812.25 4328.25,2812.25 4328.25,2410.75 v1(4375,2364)
ADC5: IC1.23 R_2_2.2 U1_2.1 | length 914.7
  Top Layer w10: v1(4453,2407) 4542.77,2317.23 4542.77,2294.33 4547.41,2289.68 4555.9,2281.19 4556.79,2281.19 R_2_2.2@4661.7,2176.28 4682.02,2176.28 U1_2.1@4710.75,2147.55
  Bottom Layer w10: IC1.23@4273,2831.93 4351.07,2831.93 4351.07,2520.93 v1@4455,2417
ADC6: IC1.22 R_5_2.2 U1_2.14 | length 883.5
  Top Layer w10: v1(4578,2546) 4650.47,2473.53 4723.3,2473.53 4841.12,2355.7 4841.12,2334.55 U1_2.14@4869.43,2306.23
  Bottom Layer w10: IC1.22@4273,2851.62 4380.38,2851.62 4380.38,2778.62 4584,2575 v1@4584,2563
ADC7: IC1.21 R_2_3.2 U1_3.1 | length 948.5
  Top Layer w10: v1(4621,2599) 4670.51,2549.49 4790.41,2549.49 ; 4779.33,2554.09 4790.41,2549.49 ; U1_3.1@4984.63,2485.28 4947.09,2500.83 R_2_3.2@4928.31,2493.06 4791.24,2549.83 4790.41,2549.49
  Bottom Layer w10: IC1.21@4273,2871.3 4493.7,2871.3 4620,2745 v1@4620,2608
ADC8: IC1.20 R_5_3.2 U1_3.14 | length 881
  Top Layer w10: v1(4709,2767) 4733.25,2791.25 4871.47,2791.25 5025.41,2727.48 5033.51,2707.93 U1_3.14@5070.5,2692.61
  Bottom Layer w10: IC1.20@4273,2890.99 4591.01,2890.99 v1@4706,2776
ADC9: IC1.19 R_2_4.2 U1_4.1 | length 865
  Top Layer w10: v1(4730,2853) 4762,2885 4902,2885 4902.63,2885.63 R_2_4.2@5051,2885.63 5065.37,2900 U1_4.1@5106,2900
  Bottom Layer w10: IC1.19@4273,2910.67 4667.33,2910.67 v1@4720.5,2857.5
ADC10: IC1.18 R_5_4.2 U1_4.14 | length 982.9
  Top Layer w10: v1(4705,3059) 4705,3065 4703,3067 4775.37,3139.37 5051,3139.37 5065.96,3124.41 U1_4.14@5106,3124.41
  Bottom Layer w10: IC1.18@4273,2930.36 4640.36,2930.36 4706.5,2996.5 v1@4706.5,3070.5
ADC11: IC1.9 R_2_5.2 U1_5.1 | length 886.8
  Top Layer w10: v1(4864,3197) 4865.8,3198.8 4865.8,3232.78 4876.89,3237.37 4877.23,3238.2 R_2_5.2@5014.31,3294.98 5022.08,3313.75 U1_5.1@5059.62,3329.3
  Bottom Layer w10: IC1.9@4273,3107.52 4631.52,3107.52 4721,3197 v1(4864,3197)
ADC12: IC1.8 R_5_5.2 U1_5.14 | length 861.1
  Top Layer w10: v1(4642,3369) 4738.63,3465.63 4763.26,3465.63 4917.2,3529.4 4936.75,3521.3 U1_5.14@4973.74,3536.63
  Bottom Layer w10: IC1.8@4273,3127.21 4400.21,3127.21 v1(4642,3369) v1@4644,3371
ADC13: IC1.7 R_2_6.2 U1_6.1 | length 887.4
  Top Layer w10: v1(4590,3451) 4610.96,3451 4709.81,3549.85 4718.3,3558.34 4718.3,3559.23 R_2_6.2@4823.21,3664.14 4823.21,3684.47 U1_6.1@4851.94,3713.2
  Bottom Layer w10: IC1.7@4273,3146.89 4390.89,3146.89 4590,3346 v1(4590,3451)
ADC14: IC1.6 R_5_6.2 U1_6.14 | length 1009.5
  Top Layer w10: v1(4460,3578) 4460,3582.5 4525.97,3648.46 4525.97,3725.74 4643.79,3843.57 4664.95,3843.57 U1_6.14@4693.26,3871.88
  Bottom Layer w10: IC1.6@4273,3166.58 4379.58,3166.58 4502,3289 4502,3571 4467,3571 v1(4460,3578)
ADC15: IC1.5 R_2_7.2 U1_7.1 | length 1008.2
  Top Layer w10: v1(4410,3614) 4449.51,3653.51 4449.51,3787.41 ; 4444.92,3776.33 4449.51,3787.41 ; U1_7.1@4513.72,3981.63 4498.17,3944.09 R_2_7.2@4505.95,3925.31 4449.17,3788.24 4449.51,3787.41
  Bottom Layer w10: IC1.5@4273,3186.26 4363.26,3186.26 4481,3304 4481,3487 4410,3558 v1(4410,3614)
ADC16: IC1.4 R_5_7.2 U1_7.14 | length 1113.7
  Top Layer w10: v1(4237,3695) 4207.75,3724.25 4207.75,3868.47 4271.52,4022.41 4291.07,4030.51 U1_7.14@4306.39,4067.5
  Bottom Layer w10: v1(4237,3695) 4237,3674 4452,3459 4452,3303 4354.95,3205.95 IC1.4@4273,3205.95
ADC17: IC1.3 R_2_8.2 U1_8.1 | length 1033.1
  Top Layer w10: U1_8.1@4101,4106 4101,4065.37 R_2_8.2@4115.37,4051 4115.37,3902.63 4116,3902 4116,3750 v1(4138,3728)
  Bottom Layer w10: v1(4138,3728) 4232,3634 4232,3527 4330.63,3428.37 4330.63,3225.63 IC1.3@4273,3225.63
ADC18: IC1.100 R_5_8.2 U1_8.14 | length 936.9
  Top Layer w10: U1_8.14@3876.59,4106 3876.59,4065.96 3861.63,4051 3861.63,3786.37 v1(3916,3732)
  Bottom Layer w10: v1(3916,3732) 3916,3693 4215.91,3393.09 IC1.100@4215.91,3322.09
ADC19: IC1.99 R_2_9.2 U1_9.1 | length 966.1
  Top Layer w10: U1_9.1@3669.7,4057.62 3685.25,4020.08 R_2_9.2@3704.03,4012.31 3760.8,3875.23 3761.63,3874.89 3766.22,3863.8 3766.22,3753.78 v1(3803,3717)
  Bottom Layer w10: v1@3811,3718 3856,3718 4196.23,3377.77 IC1.99@4196.23,3322.09
ADC20: IC1.98 R_5_9.2 U1_9.14 | length 1095.1
  Top Layer w10: U1_9.14@3462.37,3971.74 3477.7,3934.75 3469.6,3915.2 3533.37,3761.26 3533.37,3734.63 v1(3633,3635)
  Bottom Layer w10: v1(3633,3635) 3909,3635 4176.54,3367.46 IC1.98@4176.54,3322.09
ADC21: IC1.94 R_2_10.2 U1_10.1 | length 1092.5
  Top Layer w10: U1_10.1@3290.25,3846.45 3318.98,3817.72 R_2_10.2@3339.3,3817.72 3444.21,3712.81 3445.1,3712.81 ; 3453.59,3704.32 3445.1,3712.81 ; v1(3561,3599) 3447.19,3712.81 3445.1,3712.81
  Bottom Layer w10: v1(3561,3599) 3617,3543 3972,3543 4097.8,3417.2 IC1.94@4097.8,3322.09
ADC22: IC1.93 R_5_10.2 U1_10.14 | length 1181.4
  Top Layer w10: U1_10.14@3131.57,3687.77 3159.88,3659.46 3159.88,3638.3 3277.7,3520.47 3352.03,3520.47 3376.5,3496 3405.5,3496 3416.5,3507 v1(3467,3507)
  Bottom Layer w10: v1(3467,3507) 3481,3521 3965,3521 4078.12,3407.88 IC1.93@4078.12,3322.09
ADC23: IC1.92 R_2_11.2 U1_11.1 | length 1226.8
  Top Layer w10: U1_11.1@3018.37,3515.72 3055.91,3500.17 R_2_11.2@3074.69,3507.95 3204.92,3454 ; 3223.67,3446.91 3212.59,3451.51 3211.76,3451.17 3204.92,3454 ; v1(3396,3434) 3376,3454 3204.92,3454
  Bottom Layer w10: v1(3396,3434) 3534,3434 3597,3497 3959,3497 4058.43,3397.57 IC1.92@4058.43,3322.09
ADC24: IC1.91 R_5_11.2 U1_11.14 | length 1347.5
  Top Layer w10: U1_11.14@2932.5,3308.39 2969.49,3293.07 2977.59,3273.52 3131.53,3209.75 3233.75,3209.75 v1(3305,3281)
  Bottom Layer w10: v1(3305,3281) 3405,3281 3503,3379 3658.5,3379 3756.5,3477 3948,3477 4038.75,3386.25 IC1.91@4038.75,3322.09
ADC25: IC1.44 R_2_12.2 U1_12.1 | length 1594
  Top Layer w10: U1_12.1@2892,3101 2932.63,3101 R_2_12.2@2947,3115.37 3095.37,3115.37 3096,3116 3243,3116 v1(3273,3146)
  Bottom Layer w10: v1(3273,3146) 3265,3138 3265,2959 3313,2911 3313,2835.78 3337,2811.78 3337,2766 3389,2714 3489,2714 3649,2554 3840,2554 3861.58,2575.58 IC1.44@3861.58,2735.47
ADC26: IC1.43 R_5_12.2 U1_12.14 | length 1410.5
  Top Layer w10: U1_12.14@2892,2876.59 2932.04,2876.59 2947,2861.63 3259.63,2861.63 v1(3271,2873)
  Bottom Layer w10: v1@3262,2866 3262,2832.19 3262.84,2831.35 3262.84,2827.16 3266,2824 3296.5,2824 3317,2803.5 3317,2774.5 3312,2769.5 3312,2762.72 3380.72,2694 3468,2694 3647,2515 3851,2515 3881.27,2545.27 IC1.43@3881.27,2735.47
ADC27: IC1.42 R_2_13.2 U1_13.1 | length 1364.9
  Top Layer w10: U1_13.1@2942.38,2664.7 2979.92,2680.25 R_2_13.2@2987.69,2699.03 3124.77,2755.8 3125.11,2756.63 3136.2,2761.22 3254.22,2761.22 v1(3282,2789)
  Bottom Layer w10: v1@3274,2794 3292,2776 3292,2754.43 3376.43,2670 3430,2670 3608,2492 3862,2492 3900.95,2530.95 IC1.42@3900.95,2735.47
ADC28: IC1.41 R_5_13.2 U1_13.14 | length 1242.9
  Top Layer w10: U1_13.14@3028.26,2457.37 3065.25,2472.7 3084.8,2464.6 3227.74,2523.81 ; 3238.74,2528.37 3227.74,2523.81 ; v1(3376,2587) 3312.81,2523.81 3227.74,2523.81
  Bottom Layer w10: v1@3389,2582 3421,2582 3531,2472 3920.64,2472 IC1.41@3920.64,2735.47
ADC29: IC1.35 R_2_14.2 U1_14.1 | length 1268.5
  Top Layer w10: U1_14.1@3147.55,2289.25 3176.28,2317.98 R_2_14.2@3176.28,2338.3 3281.19,2443.21 3281.19,2444.1 3285,2447.91 3294.32,2457.23 3364.23,2457.23 v1(3428,2521)
  Bottom Layer w10: v1@3437,2514 3507,2444 3966,2444 4038.75,2516.75 IC1.35@4038.75,2735.47
ADC30: IC1.34 R_5_14.2 U1_14.14 | length 1154.7
  Top Layer w10: U1_14.14@3306.23,2130.57 3334.54,2158.88 3355.7,2158.88 3473.53,2276.7 3473.53,2329.53 v1(3549,2405)
  Bottom Layer w10: v1@3565,2401 3588,2424 3978,2424 4058.43,2504.43 IC1.34@4058.43,2735.47
ADC31: IC1.33 R_2_15.2 U1_15.1 | length 1173.9
  Top Layer w10: U1_15.1@3484.28,2016.37 3499.83,2053.91 R_2_15.2@3492.05,2072.69 3548.83,2209.76 3548.49,2210.59 ; 3553.09,2221.67 3548.49,2210.59 ; v1(3595,2372) 3595,2367 3548.49,2320.49 3548.49,2210.59
  Bottom Layer w10: v1@3605,2369 3639,2403 3995,2403 4078.12,2486.12 IC1.33@4078.12,2735.47
ADC32: IC1.32 R_5_15.2 U1_15.14 | length 1018
  Top Layer w10: U1_15.14@3691.61,1930.5 3706.93,1967.49 3726.48,1975.59 3790.25,2129.53 3790.25,2279.25 v1(3795,2284)
  Bottom Layer w10: v1@3802,2294 3819,2311 3938,2311 4097.8,2470.8 IC1.32@4097.8,2735.47
GND: C1.1 C2.1 C3-tantale.2 C4.1 C5.1 C6.2 C_1.1 C_1_1.1 C_1_2.1 C_1_3.1 C_1_4.1 C_1_5.1 C_1_6.1 C_1_7.1 C_1_8.1 C_1_9.1 C_1_10.1 C_1_11.1 C_1_12.1 C_1_13.1 C_1_14.1 C_1_15.1 C_3.1 C_3_1.1 C_3_2.1 C_3_3.1 C_3_4.1 C_3_5.1 C_3_6.1 C_3_7.1 C_3_8.1 C_3_9.1 C_3_10.1 C_3_11.1 C_3_12.1 C_3_13.1 C_3_14.1 C_3_15.1 Debug.2 IC1.15 IC1.31 IC1.36 IC1.45 IC1.65 IC1.75 MCP1700_330.1 P1.1 P2.1 pk.3 R3.1 U1.11 U1_1.11 U1_2.11 U1_3.11 U1_4.11 U1_5.11 U1_6.11 U1_7.11 U1_8.11 U1_9.11 U1_10.11 U1_11.11 U1_12.11 U1_13.11 U1_14.11 U1_15.11 | length 19870.5
  Top Layer w10: U1_12.11@2815.23,2876.59 2815.23,2889.59 2890.76,2965.12 2976.84,2965.12 2995.88,2946.07 2995.88,2917.16 3004.67,2908.38 3057.38,2908.38 3096,2947 C_3_12.1@3105.37,2947 ; U1_11.11@2861.57,3337.77 2866.54,3349.77 2965.23,3390.65 3044.75,3357.71 3055.06,3332.83 3044,3306.12 3048.75,3294.64 3097.45,3274.47 3147.91,3295.37 C_3_11.1@3156.57,3291.79 C_1_11.1@3182.98,3355.53 3191.47,3355.53 v1(3247,3300) ; U1_13.11@2957.33,2427.99 2952.36,2440 2993.23,2538.69 3072.76,2571.63 3097.64,2561.32 3108.7,2534.61 3120.18,2529.86 3168.88,2550.03 3189.78,2600.49 C_3_13.1@3198.44,2604.08 C_1_13.1@3172.04,2667.82 3266.18,2667.82 v1(3267,2667) ; U1_10.11@3077.28,3742.05 3086.47,3751.24 3193.29,3751.24 3254.15,3690.38 3254.15,3663.44 3233.71,3643 3233.71,3630.58 3270.98,3593.3 3325.6,3593.3 C_3_10.1@3332.23,3586.68 C_1_10.1@3381.02,3635.47 3381.02,3540.98 v1(3391,3531) ; C_1_12.1@3105.37,3016 C_3_12.1@3105.37,2947 ; v1(3197,2981) 3163,2947 C_3_12.1@3105.37,2947 ; U1_14.11@3251.95,2076.28 3242.76,2085.47 3242.76,2192.29 3303.62,2253.15 3330.56,2253.15 3351,2232.71 3363.42,2232.71 3400.7,2269.98 3400.7,2324.6 C_3_14.1@3407.32,2331.23 ; C_1_14.1@3358.53,2380.02 C_3_14.1@3407.32,2331.23 ; U1_9.11@3432.99,4042.67 3445,4047.64 3543.69,4006.77 3576.63,3927.24 3566.32,3902.36 3539.61,3891.3 3534.86,3879.82 3555.03,3831.12 3605.49,3810.22 C_3_9.1@3609.08,3801.56 C_1_9.1@3672.82,3827.96 3672.82,3744.82 v1(3650,3722) ; v1(3459,2403) 3407.32,2351.32 C_3_14.1@3407.32,2331.23 ; v1(3638,2653) 3793,2498 v1(3956,2498) 4085,2498 4123,2536 ; U1_15.11@3662.23,1859.57 3650.23,1864.54 3609.35,1963.23 3642.29,2042.75 3667.17,2053.06 3693.88,2042 3705.36,2046.75 3725.53,2095.45 3704.63,2145.91 C_3_15.1@3708.21,2154.57 C_1_15.1@3644.47,2180.98 3701,2237.51 v1(3701,2260) ; v1(3759,3430) 3815.38,3373.62 3815.38,3226.41 3854,3187.79 C1.1@3854,3169.63 ; Debug.2@3853.01,2901 3853.01,3168.64 C1.1@3854,3169.63 ; U1_8.11@3876.59,4182.77 3889.59,4182.77 3965.12,4107.24 3965.12,4021.16 3946.07,4002.12 3917.16,4002.12 3908.38,3993.33 3908.38,3940.62 3947,3902 C_3_8.1@3947,3892.63 C_1_8.1@4016,3892.63 4016,3830 v1(3975,3789) ; v1(4020,2201) 3985,2166 C_1.1@3985,2108.37 C_3.1@4054,2108.37 4054,2099 4092.62,2060.38 4092.62,2007.67 4083.84,1998.88 4054.93,1998.88 4035.88,1979.84 4035.88,1893.76 4111.41,1818.23 U1.11@4124.41,1818.23 ; v1@4157,2570 v1(4153,2566) 4123,2536 ; v1(4288,3745) 4353.53,3810.53 C_1_7.1@4353.53,3817.03 C_3_7.1@4289.79,3843.43 4293.37,3852.09 4272.47,3902.55 4292.64,3951.25 4304.12,3956 4330.83,3944.94 4355.71,3955.25 4388.65,4034.77 4347.77,4133.46 U1_7.11@4335.77,4138.43 ; v1(4326,2274) 4328.18,2271.82 C_1_1.1@4328.18,2174.04 C_3_1.1@4391.92,2200.44 4395.51,2191.78 4445.97,2170.88 4466.14,2122.19 4461.39,2110.7 4434.68,2099.64 4424.37,2074.76 4457.31,1995.23 4556,1954.36 U1_1.11@4568.01,1959.33 ; P1.1@4388,3322 4219.63,3153.63 C2.1@4146,3153.63 4091.62,3099.25 4091.62,3045.41 4082.84,3036.62 4023.16,3036.62 3994.42,3065.37 R3.1@3931,3065.37 MCP1700_330.1@3931,3150 3873.63,3150 C1.1@3854,3169.63 ; P1.1@4397,3331 4441.5,3375.5 4670,3147 4670,2971.72 4653.28,2955 4627,2955 4617,2945 ; v1(4529,3602) 4549.42,3622.42 C_1_6.1@4640.96,3622.42 C_3_6.1@4592.17,3671.21 4598.8,3677.84 4598.8,3732.46 4636.07,3769.73 4648.5,3769.73 4668.94,3749.29 4695.87,3749.29 4756.74,3810.16 4756.74,3916.97 U1_6.11@4747.55,3926.16 ; v1(4579,2438) 4619.98,2397.02 C_1_2.1@4619.98,2358.53 C_3_2.1@4668.77,2407.32 4675.4,2400.7 4730.02,2400.7 4767.29,2363.42 4767.29,2351 4746.85,2330.56 4746.85,2303.62 4807.71,2242.76 4914.53,2242.76 U1_2.11@4923.72,2251.95 ; v1(4722,3329) 4724.82,3326.18 C_1_5.1@4829.96,3326.18 C_3_5.1@4803.56,3389.92 4812.22,3393.51 4833.12,3443.97 4881.82,3464.14 4893.3,3459.39 4904.36,3432.68 4929.24,3422.37 5008.77,3455.31 5049.64,3554 U1_5.11@5044.67,3566.01 ; v1(4749,2715) 4818.53,2645.47 C_1_3.1@4820.03,2645.47 C_3_3.1@4846.43,2709.21 4855.09,2705.63 4905.55,2726.53 4954.25,2706.36 4959,2694.88 4947.94,2668.17 4958.25,2643.29 5037.77,2610.35 5136.46,2651.23 U1_3.11@5141.43,2663.23 ; 4802,2945 4774,2945 ; U1_4.11@5182.77,3124.41 5182.77,3111.41 5107.24,3035.88 5021.16,3035.88 5002.12,3054.93 5002.12,3083.84 4993.33,3092.62 4940.62,3092.62 4902,3054 C_3_4.1@4892.63,3054 C_1_4.1@4892.63,2985 4818,2985 v1(4805,2998) 4774,2967 4774,2945 ; 4123,2536 4208,2536 4617,2945 ; 4617,2945 4774,2945
  Bottom Layer w10: 3222.8,3191.31 3325.69,3191.31 3390.43,3126.57 3390.43,3080.57 3441.37,3029.63 ; pk.3@3552,2976 3444.37,2976 C4.1@3441.37,2973 3441.37,3029.63 ; v1(3638,2653) 3716,2575 3770.37,2575 C5.1@3818.37,2623 3841.9,2646.53 IC1.45@3841.9,2735.47 ; IC1.65@3686.39,3068.15 3645.15,3068.15 3603,3026 3496,3026 3452,3070 3452,3040.26 3441.37,3029.63 ; IC1.75@3686.39,3265 3686.39,3329.39 3759,3402 v1(3759,3430) C3-tantale.2@3837.63,3430 ; v1(3956,2498) 3977,2519 C6.2@3977,2558.63 4019.06,2600.69 4019.06,2695.68 ; IC1.36@4019.06,2735.47 4019.06,2695.68 ; 4019.38,2698.2 4019.38,2695.36 4019.06,2695.68 ; IC1.31@4117.49,2735.47 4117.49,2601.51 v1(4153,2566) ; IC1.15@4273,2989.41 4317.59,2989.41 4357,2950 4525,2950 4676,3101 4786,3101 4800.4,3086.6 4800.4,2943.75
  Bottom Layer w30: 4740.74,3303.22 ccw(c4000,3000) 3222.8,3191.31 ccw(c4000,3000) 3199.96,3023.94 ccw(c4000,3000) 4800.4,2998 ccw(c4000,3000) v1@4800.4,3000
MCLR: C4.2 IC1.13 pk.1 R1.1 | length 1168.9
  Bottom Layer w10: C4.2@3375.63,2973 3362,2959.37 3362,2866.63 3437,2791.63 3547.37,2791.63 3567.35,2771.65 3722.13,2771.65 3979.25,3028.78 IC1.13@4273,3028.78
NetC1_2: C1.2 MCP1700_330.2 P1.2 | length 736.1
  Top Layer w10: MCP1700_330.2@3990.06,3236.61 3865.76,3236.61 4060.14,3431 P1.2@4397,3431
NetC3-tantale_1: C3-tantale.1 IC1.85 | length 110.3
  Bottom Layer w10: C3-tantale.1@3917.37,3431 3920.64,3427.73 IC1.85@3920.64,3322.09
NetC_2_1: C_2.1 R_3.1 | length 189.5
  Top Layer w10: C_2.1@3815.63,1600 3815.63,1776.26 R_3.1@3825,1785.63
NetC_2_1_1: C_2_1.1 R_3_1.1 | length 189.5
  Top Layer w10: R_3_1.1@4303.86,1814.63 4298.79,1802.39 C_2_1.1@4366.24,1639.55
NetC_2_1_2: C_2_1.2 R_1_1.2 U1_1.7 | length 143.8
  Top Layer w10: U1_1.7@4390.06,1802.52 4442.04,1677.04 C_2_1.2@4438.99,1669.68
NetC_2_2: C_2.2 R_1.2 U1.7 | length 143.8
  Top Layer w10: C_2.2@3894.37,1600 3900,1605.63 U1.7@3900,1741.46
NetC_2_2_1: C_2_2.1 R_3_2.1 | length 189.5
  Top Layer w10: R_3_2.1@4735.06,2017.18 4735.06,2003.93 C_2_2.1@4859.69,1879.3
NetC_2_2_2: C_2_2.2 R_1_2.2 U1_2.7 | length 143.8
  Top Layer w10: U1_2.7@4819.32,2038.98 4915.37,1942.94 C_2_2.2@4915.37,1934.97
NetC_2_3_1: C_2_3.1 R_3_3.1 | length 189.5
  Top Layer w10: R_3_3.1@5056.97,2374.14 5062.04,2361.9 C_2_3.1@5224.88,2294.44
NetC_2_3_2: C_2_3.2 R_1_3.2 U1_3.7 | length 143.8
  Top Layer w10: U1_3.7@5126.48,2426.53 5251.97,2374.55 C_2_3.2@5255.02,2367.19
NetC_2_4_1: C_2_4.1 R_3_4.1 | length 189.5
  Top Layer w10: R_3_4.1@5215.37,2825 5224.74,2815.63 C_2_4.1@5401,2815.63
NetC_2_4_2: C_2_4.2 R_1_4.2 U1_4.7 | length 143.8
  Top Layer w10: U1_4.7@5259.54,2900 5395.37,2900 C_2_4.2@5401,2894.37
NetC_2_5_1: C_2_5.1 R_3_5.1 | length 189.5
  Top Layer w10: R_3_5.1@5189.37,3301.86 5201.61,3296.79 C_2_5.1@5364.45,3364.24
NetC_2_5_2: C_2_5.2 R_1_5.2 U1_5.7 | length 143.8
  Top Layer w10: U1_5.7@5201.48,3388.06 5326.96,3440.04 C_2_5.2@5334.32,3436.99
NetC_2_6_1: C_2_6.1 R_3_6.1 | length 189.5
  Top Layer w10: R_3_6.1@4982.31,3737.5 4995.56,3737.5 C_2_6.1@5120.2,3862.13
NetC_2_6_2: C_2_6.2 R_1_6.2 U1_6.7 | length 143.8
  Top Layer w10: U1_6.7@4960.51,3821.77 5056.56,3917.81 C_2_6.2@5064.52,3917.81
NetC_2_7_1: C_2_7.1 R_3_7.1 | length 189.5
  Top Layer w10: R_3_7.1@4624.86,4053.97 4637.1,4059.04 C_2_7.1@4704.56,4221.88
NetC_2_7_2: C_2_7.2 R_1_7.2 U1_7.7 | length 143.8
  Top Layer w10: U1_7.7@4572.48,4123.48 4624.45,4248.97 C_2_7.2@4631.81,4252.02
NetC_2_8_1: C_2_8.1 R_3_8.1 | length 189.5
  Top Layer w10: R_3_8.1@4176,4215.37 4185.37,4224.74 C_2_8.1@4185.37,4401
NetC_2_8_2: C_2_8.2 R_1_8.2 U1_8.7 | length 143.8
  Top Layer w10: U1_8.7@4101,4259.54 4101,4395.37 C_2_8.2@4106.63,4401
NetC_2_9_1: C_2_9.1 R_3_9.1 | length 189.5
  Top Layer w10: C_2_9.1@3634.76,4362.45 3702.21,4199.61 R_3_9.1@3697.14,4187.37
NetC_2_9_2: C_2_9.2 R_1_9.2 U1_9.7 | length 143.8
  Top Layer w10: C_2_9.2@3562.01,4332.32 3558.96,4324.96 U1_9.7@3610.94,4199.48
NetC_2_10_1: C_2_10.1 R_3_10.1 | length 189.5
  Top Layer w10: C_2_10.1@3141.31,4114.7 3265.94,3990.07 R_3_10.1@3265.94,3976.82
NetC_2_10_2: C_2_10.2 R_1_10.2 U1_10.7 | length 143.8
  Top Layer w10: C_2_10.2@3085.63,4059.03 3085.63,4051.06 U1_10.7@3181.68,3955.02
NetC_2_11_1: C_2_11.1 R_3_11.1 | length 189.5
  Top Layer w10: C_2_11.1@2778.12,3706.56 2940.96,3639.1 R_3_11.1@2946.03,3626.86
NetC_2_11_2: C_2_11.2 R_1_11.2 U1_11.7 | length 143.8
  Top Layer w10: C_2_11.2@2747.98,3633.81 2751.03,3626.45 U1_11.7@2876.52,3574.47
NetC_2_12_1: C_2_12.1 R_3_12.1 | length 189.5
  Top Layer w10: C_2_12.1@2597,3185.37 2773.26,3185.37 R_3_12.1@2782.63,3176
NetC_2_12_2: C_2_12.2 R_1_12.2 U1_12.7 | length 143.8
  Top Layer w10: C_2_12.2@2597,3106.63 2602.63,3101 U1_12.7@2738.46,3101
NetC_2_13_1: C_2_13.1 R_3_13.1 | length 189.5
  Top Layer w10: C_2_13.1@2637.55,2629.76 2800.39,2697.21 R_3_13.1@2812.63,2692.14